# Altium PCB PBC2A.PcbDoc
Units mm, origin at the board's own origin, x right, y up, seen from the top; angles counter-clockwise.
Board outline 55 x 70 mm, 2 copper layers (Top Layer, Bottom Layer); 74 components, 53 nets, 225 pads, 17 vias.
Unrouted connection lines stored in the file: 43.
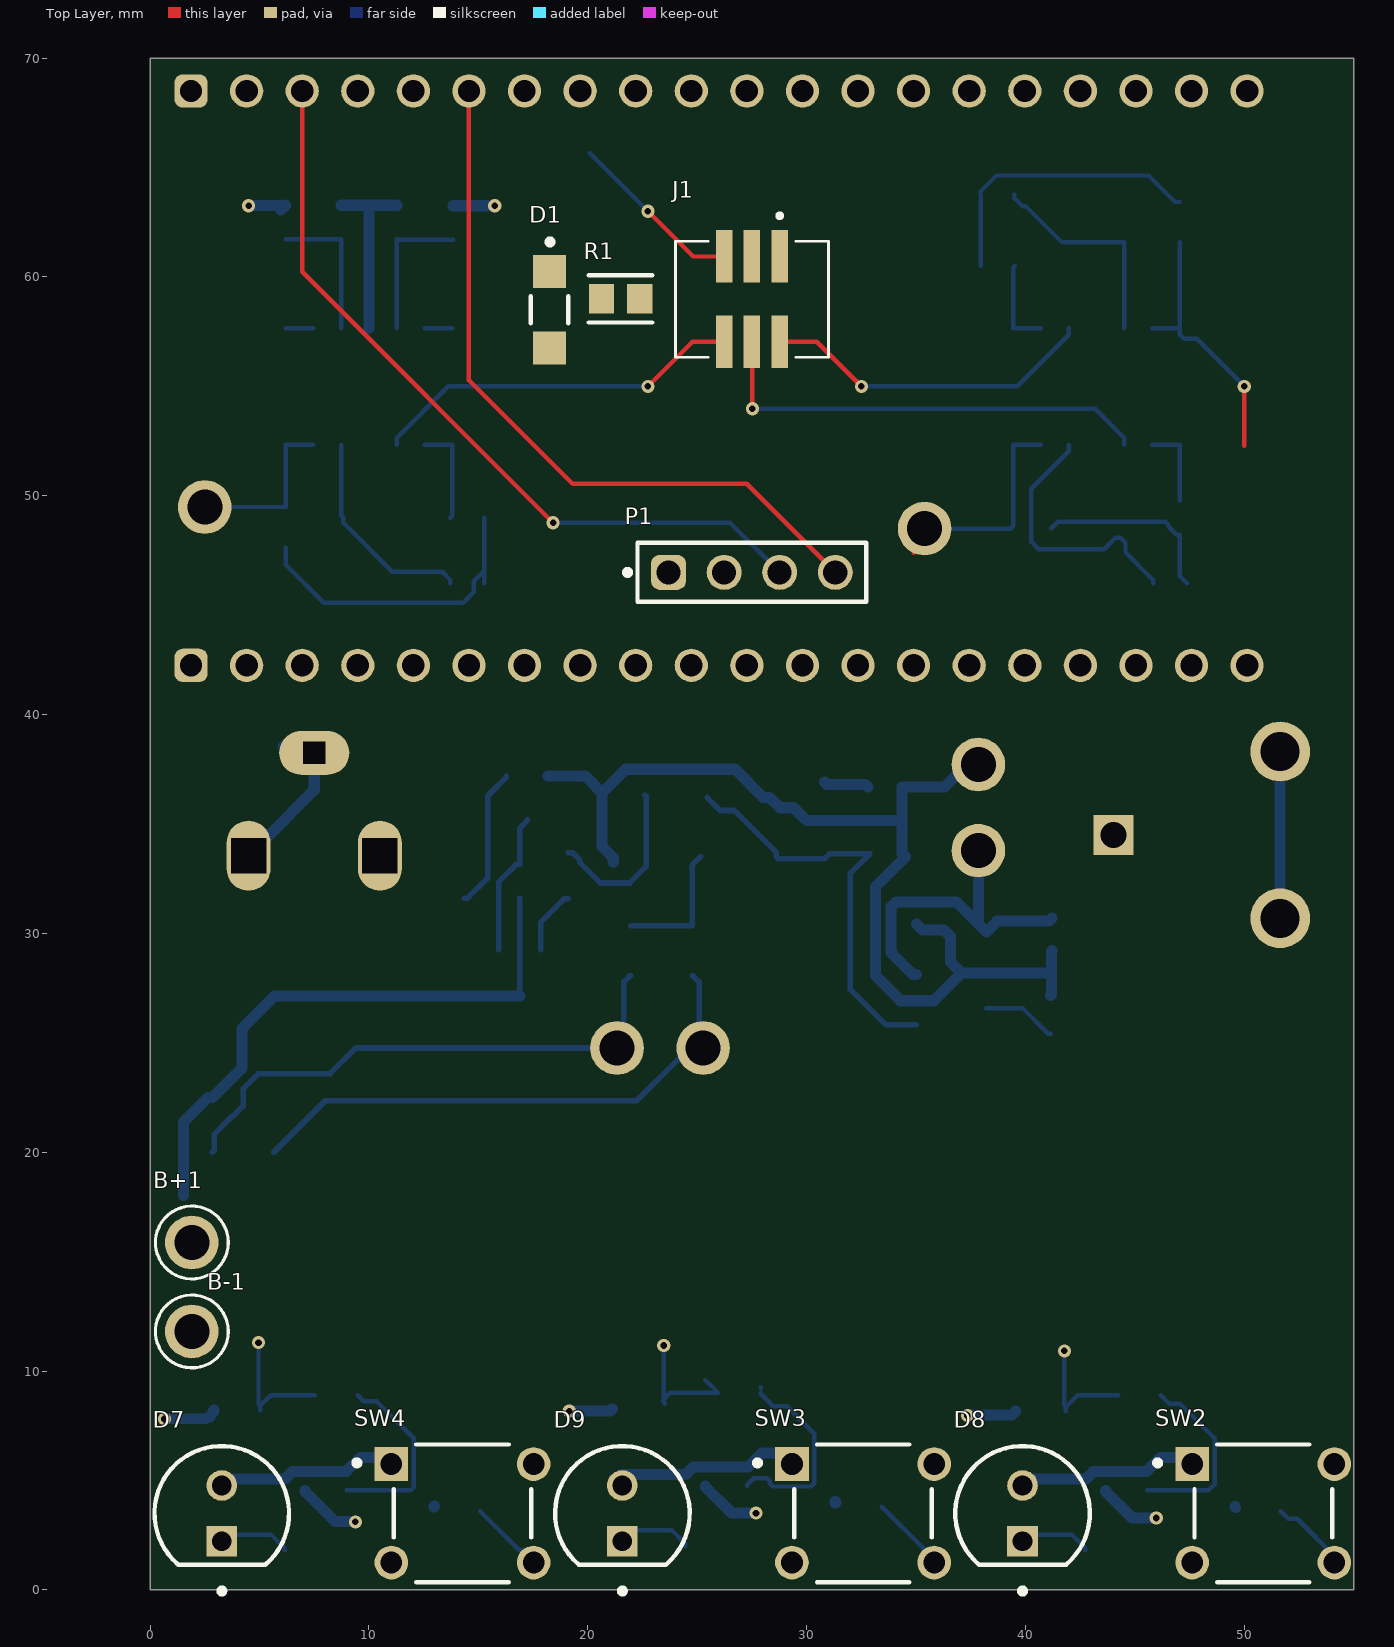
[diagram p0: Top Layer view]
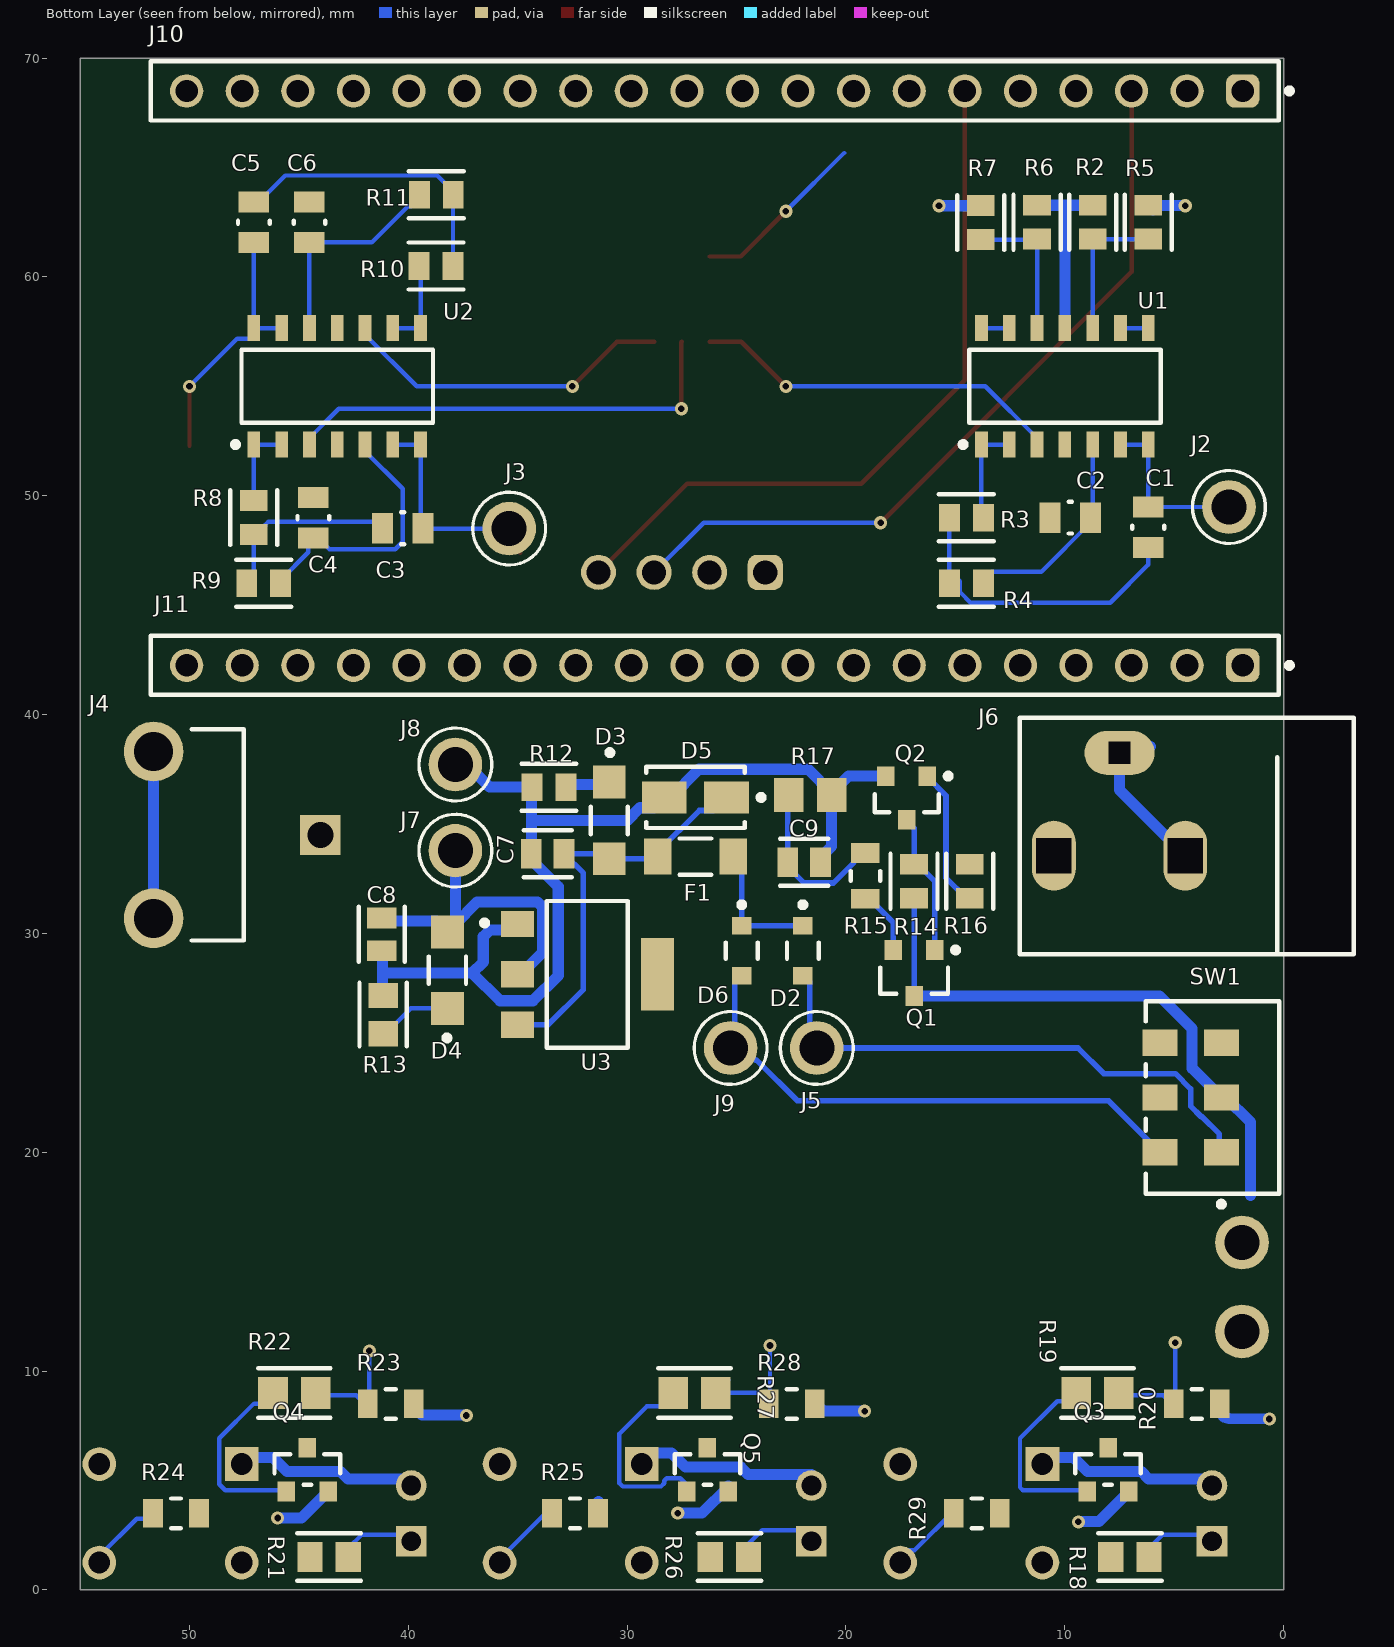
[diagram p1: Bottom Layer view, seen from below]
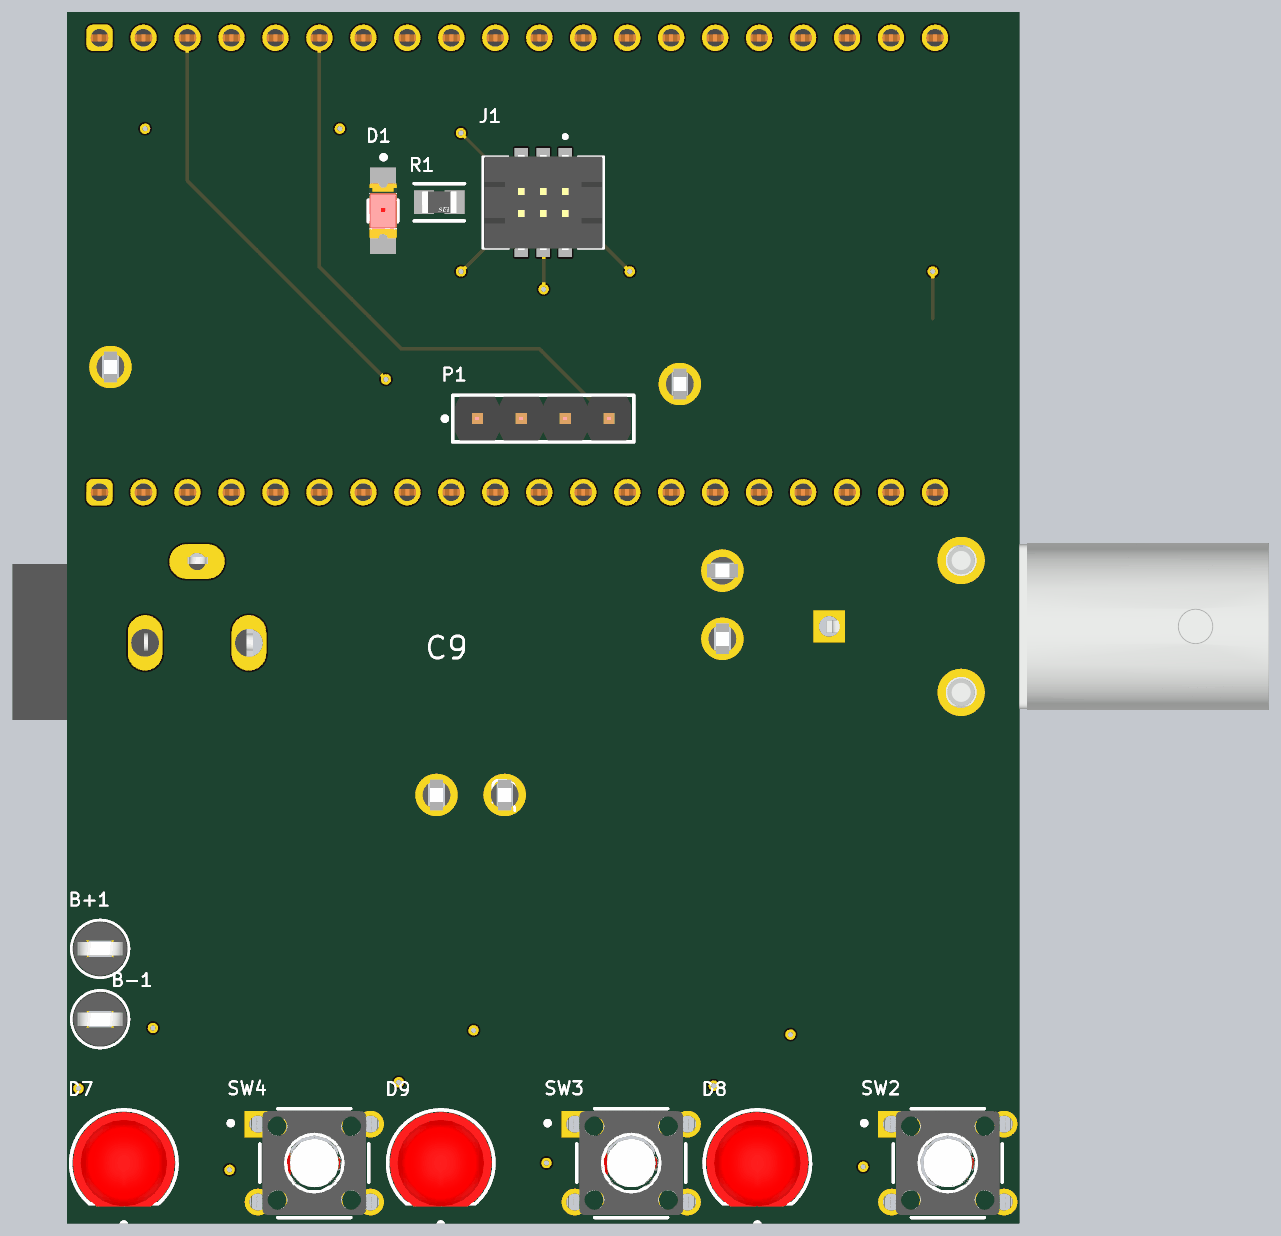
[diagram p2: 3D render of the assembled board from above, using the file's embedded part models]
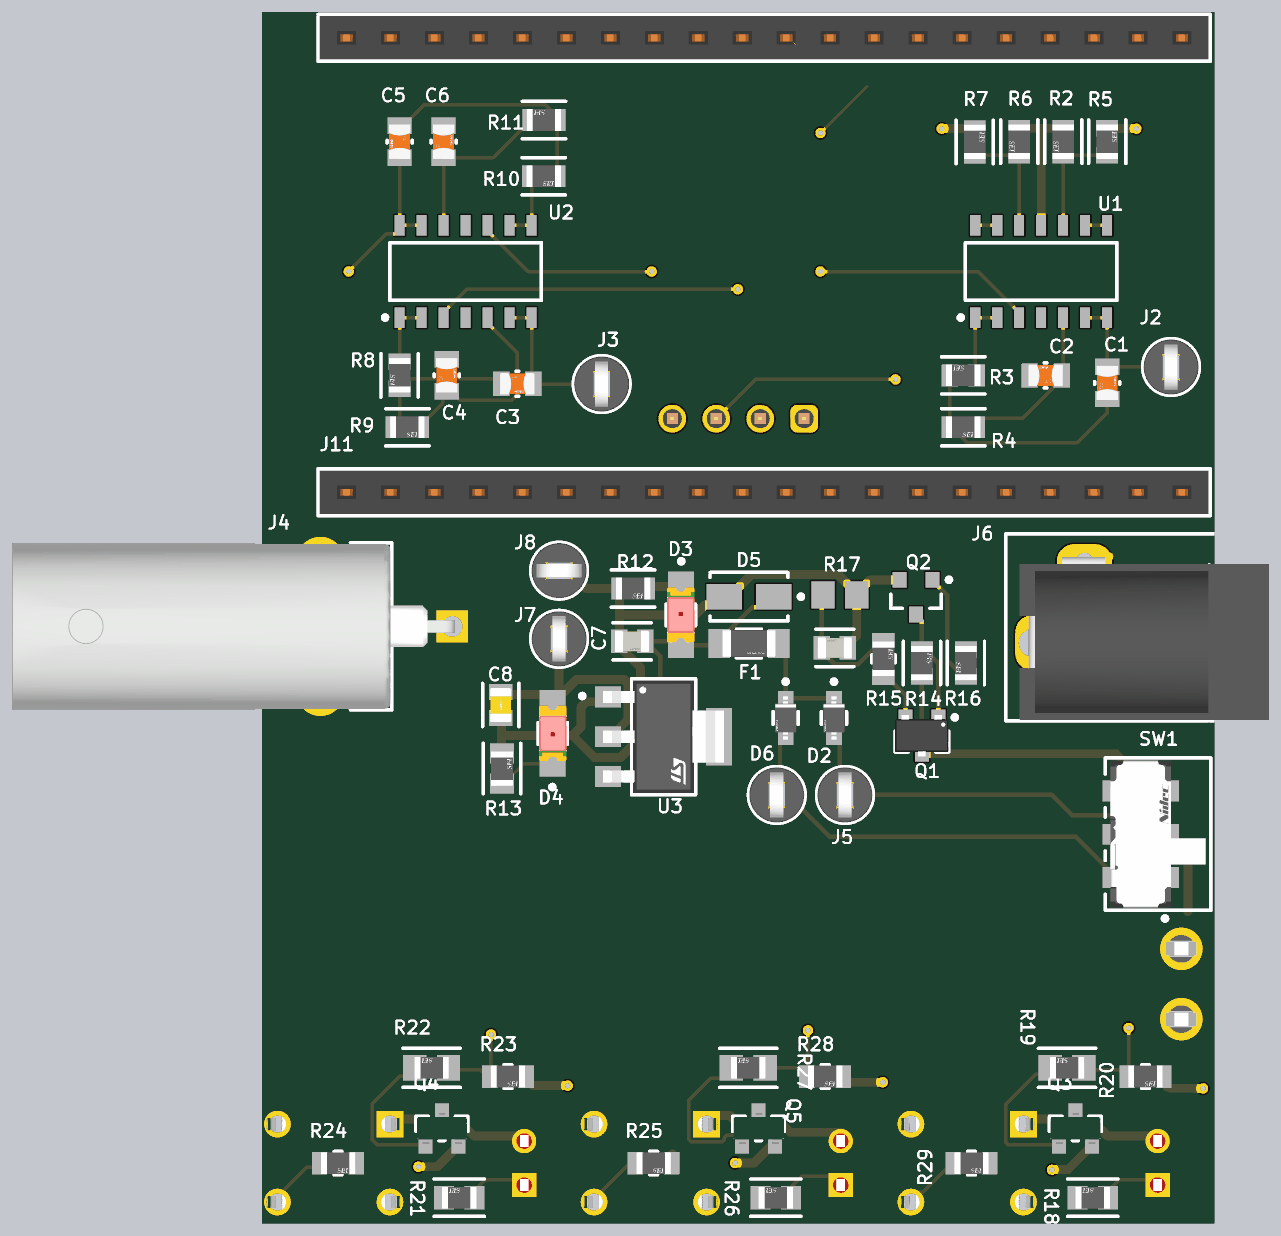
[diagram p3: 3D render of the assembled board from below, using the file's embedded part models]

## Layer stack, top to bottom
Top Solder: solder mask 0.0102, Solder Resist, Dk 3.5
Top Layer: signal copper 0.0356
Dielectric 1: dielectric 0.32, FR-4, Dk 4.8
Bottom Layer: signal copper 0.0356
Bottom Solder: solder mask 0.0102, Solder Resist, Dk 3.5

## Board outline
0,0 55,0 55,70 0,70

## Design rules (kind name [scope] priority, off if disabled: settings)
Clearance "Polygon Clearance" [InPolygon] p1: gap=0.254 ignorepadtopadclearanceinfootprint=TRUE
Clearance [All] p2: gap=0.152 ignorepadtopadclearanceinfootprint=FALSE
HoleSize [All] p1: absolutevalues=TRUE maxlimit=25.4 minlimit=0.2 maxpercent=80.000 minpercent=20.000
MinimumSolderMaskSliver [All] p1: minsoldermaskwidth=0.102
PolygonConnect [All] p1: connectstyle=Relief reliefconductorwidth=0.254 reliefentries=4 polygonreliefangle="90 Angle" airgapwidth=0.254
RoutingCorners [All] p1: cornerstyle=45-Degree minsetback=0.254 maxsetback=0.254
RoutingVias [All] p1: holewidth=0.3 width=0.6 viastyle="Through Hole" minholewidth=0.3 minwidth=0.6 maxholewidth=0.3 maxwidth=0.6
SilkToSolderMaskClearance SilkscreenOverComponentPads [All] p1: minsilkscreentomaskgap=0.1 clearancetoexposedcopper=TRUE
SolderMaskExpansion [All] p1: expansion=0.102 istentingtop=FALSE
SupplyNets "Schematic Supply Nets" [InNet('+3V3')] p1: voltage=0.000
Width "Width GND" [InNet('GND')] p1: maxlimit=0.508 minlimit=0.508 preferedwidth=0.508
Width "Width Power" [InNet('+3V3') OR InNetClass('PWR')] p2: maxlimit=0.508 minlimit=0.508 preferedwidth=0.508
Width [All] p3: maxlimit=0.508 minlimit=0.152 preferedwidth=0.203
26 further rules are at their usual default settings.

## Components (designator, comment, footprint, x,y, rotation, side; value= is the part's Value field where it differs from the comment)
B+1 "5006" FP-5006-MFG 1.905,15.875 r0 top
B-1 "5006" FP-5006-MFG 1.905,11.811 r0 top
C1 "33nF" FP-CC0805-0_85-MFG 6.19,48.561 r90 bottom value="33 nF"
C2 "33nF" FP-CC0805-0_85-MFG 9.75,49 r0 bottom value="33 nF"
C3 "33nF" FP-CC0805-0_85-MFG 40.259,48.514 r180 bottom value="33 nF"
C4 "33nF" FP-CC0805-0_85-MFG 44.342,49 r90 bottom value="33 nF"
C5 "33nF" FP-CC0805-0_85-MFG 47.06,62.5 r270 bottom value="33 nF"
C6 "33nF" FP-CC0805-0_85-MFG 44.52,62.5 r90 bottom value="33 nF"
C7 "0.1uF" FP-C0805C-DN-MFG 33.634,33.637 r0 bottom value="0.10 μF"
C8 "10uF" FP-C0805C106J8RACAUTO-MFG 41.217,29.96 r270 bottom
C9 "C0805C103J5RAC7210" FP-C0805C-DN-MFG 21.916,33.257 r180 bottom value="10,000 pF"
D1 "LTST-C150KRKT" FP-LTST-C150KRKT-MFG 18.25,58.5 r270 top
D2 "CUS08F30,H3F" FP-USC-MFG 21.971,29.21 r270 bottom
D3 "LTST-C150KRKT" FP-LTST-C150KRKT-MFG 30.818,35.162 r270 bottom
D4 "LTST-C150KRKT" FP-LTST-C150KRKT-MFG 38.217,28.321 r90 bottom
D5 "TVS" VISH-DO-214AC-2_L 26.881,36.215 r0 bottom
D6 "CUS08F30,H3F" FP-USC-MFG 24.765,29.21 r270 bottom
D7 "WP7113SURC" FP-WP7113SURC-MFG 3.275,3.5 r90 top
D8 "WP7113SURC" FP-WP7113SURC-MFG 39.868,3.5 r90 top
D9 "WP7113SURC" FP-WP7113SURC-MFG 21.58,3.5 r90 top
F1 "SF-1206S050-2" FP-SF-1206S-MFG 26.881,33.511 r0 bottom value=596mΩ
J1 "20021221-00006C4LF" AMPHENOL_20021221-00006C4LF 27.5,58.984 r0 top
J2 "5006" FP-5006-MFG 2.5,49.486 r90 bottom
J3 "5006" FP-5006-MFG 35.39,48.5 r90 bottom
J4 "5414373-1" FP-5414373-1-MFG 58.5,34.5 r270 bottom locked
J5 "5006" FP-5006-MFG 21.336,24.765 r270 bottom
J6 "PJ-102AH" "CON Barrel PJ-102AH" 7.5,38.25 r0 bottom locked
J7 "5006" FP-5006-MFG 37.849,33.782 r90 bottom
J8 "5006" FP-5006-MFG 37.849,37.719 r0 bottom
J9 "5006" FP-5006-MFG 25.273,24.765 r270 bottom
J10 "61302011821" 61302011821 26,68.5 r0 bottom locked
J11 "61302011821" 61302011821 26,42.25 r0 bottom
P1 "61300411121" 61300411121 27.5,46.5 r0 top locked
Q1 "SSM3J328R,LF" TOSH-SOT-23F_V 16.891,28.194 r270 bottom
Q2 "MMBT3904LT1G" ONSC-SOT-23-3-318-08_V 17.229,36.189 r270 bottom
Q3 "DMN2004K-7" FP-SOT23-MFG 8.025,5.5 r90 bottom
Q4 "DMN2004K-7" FP-SOT23-MFG 44.618,5.5 r90 bottom
Q5 "DMN2004K-7" FP-SOT23-MFG 26.33,5.5 r90 bottom
R1 "300Ω" FP-RMCF0805-IPC_B 21.5,59 r0 top
R2 "100k" FP-RMCF0805-IPC_C 8.73,62.5 r270 bottom
R3 "100k" FP-RMCF0805-IPC_C 14.5,49 r0 bottom
R4 "100k" FP-RMCF0805-IPC_C 14.5,46 r180 bottom
R5 "100k" FP-RMCF0805-IPC_C 6.19,62.5 r90 bottom
R6 "100k" FP-RMCF0805-IPC_C 11.27,62.5 r270 bottom
R7 "100k" FP-RMCF0805-IPC_C 13.843,62.484 r90 bottom
R8 "100k" FP-RMCF0805-IPC_C 47.06,49 r270 bottom
R9 "100k" FP-RMCF0805-IPC_C 46.609,46 r180 bottom
R10 "100k" FP-RMCF0805-IPC_C 38.735,60.5 r180 bottom
R11 "100k" FP-RMCF0805-IPC_C 38.721,63.75 r0 bottom
R12 "RMCF0805JT3K00" FP-RMCF0805-IPC_C 33.575,36.686 r180 bottom
R13 "RMCF0805JT300R" FP-RMCF0805-IPC_B 41.148,26.289 r90 bottom
R14 "RMCF0805FG100K" FP-RMCF0805-IPC_C 16.891,32.385 r90 bottom
R15 "RMCF0805FT10K0" FP-RMCF0805-MFG 19.113,32.629 r90 bottom
R16 "RMCF0805FT1K00" FP-RMCF0805-IPC_C 14.351,32.385 r270 bottom
R17 "ERJ-6GEYJ563V" RESC2013X70X40ML20T20 21.631,36.322 r0 bottom
R18 "300Ω" FP-RMCF0805-IPC_B 7.025,1.5 r0 bottom
R19 "100Ω" FP-RMCF0805-IPC_A 8.509,9 r0 bottom
R20 "10k" FP-RMCF0805-MFG 3.976,8.5 r180 bottom
R21 "300Ω" FP-RMCF0805-IPC_B 43.618,1.5 r0 bottom
R22 "100Ω" FP-RMCF0805-IPC_A 45.212,9 r0 bottom
R23 "10k" FP-RMCF0805-MFG 40.801,8.5 r180 bottom
R24 "10k" FP-RMCF0805-MFG 50.618,3.5 r180 bottom
R25 "10k" FP-RMCF0805-MFG 32.385,3.5 r180 bottom
R26 "300Ω" FP-RMCF0805-IPC_B 25.33,1.5 r0 bottom
R27 "100Ω" FP-RMCF0805-IPC_A 26.924,9 r0 bottom
R28 "10k" FP-RMCF0805-MFG 22.479,8.5 r180 bottom
R29 "10k" FP-RMCF0805-MFG 14.025,3.5 r180 bottom
SW1 "CL-SB-22A-11T" FP-CL-SB-22A-11T-MFG 3.25,22.5 r90 bottom
SW2 "2-1825910-7" FP-2-1825910-7-MFG 50.868,3.5 r90 top
SW3 "2-1825910-7" FP-2-1825910-7-MFG 32.58,3.5 r90 top
SW4 "2-1825910-7" FP-2-1825910-7-MFG 14.275,3.5 r90 top
U1 "LM324DR2G" ONSC-SOIC-14-751A-03_V 10,55 r90 bottom
U2 "LM324DR2G" ONSC-SOIC-14-751A-03_V 43.25,55 r90 bottom
U3 "LD1117S33CTR" FP-SOT-223-0046067_14-MFG 31.816,28.129 r180 bottom

## Footprints (in the part's own frame and the unit in brackets; to place one, negate y for a bottom-side part, rotate by r counter-clockwise, add the part's x,y. Pads: shape width x height; smd on the part's side, far side on the other; paste and mask are expansions set on the pad)
61300411121 [mm] "Pin Header, pitch 2.54 mm, THT, Vertical, single row, 4p"
  rrect50% 1.6x1.6 hole 1.1: 1(-3.81,0)
  round 1.6 hole 1.1: 2(-1.27,0) 3(1.27,0) 4(3.81,0)
  silkscreen extent -5.8,-1.35 5.23,1.34, body extent -5.08,-1.27 5.08,1.27, height 8.57
61302011821 [mm] "Socket Header, Pitch 2.54 mm, THT, Vertical, single row, 20p"
  rrect50% 1.52x1.52 hole 1.02: 1(-24.13,0)
  round 1.52 hole 1.02: 2(-21.59,0) 3(-19.05,0) 4(-16.51,0) 5(-13.97,0) 6(-11.43,0) 7(-8.89,0) 8(-6.35,0) 9(-3.81,0) 10(-1.27,0) 11(1.27,0) 12(3.81,0) 13(6.35,0) 14(8.89,0) 15(11.43,0) 16(13.97,0) 17(16.51,0) 18(19.05,0) 19(21.59,0) 20(24.13,0)
  silkscreen extent -26.38,-1.35 25.78,1.35, body extent -25.65,-1.25 25.65,1.25, height 8.55
AMPHENOL_20021221-00006C4LF [mm]
  rect 0.76x2.4 smd: 1(1.27,1.95) 2(1.27,-1.95) 3(0,1.95) 4(0,-1.95) 5(-1.27,1.95) 6(-1.27,-1.95)
  silkscreen extent -3.5,-2.65 3.5,3.91, body extent -3.4,-2.75 3.4,2.75, height 5.6
"CON Barrel PJ-102AH" [mm] "5.5mm Barrel Plug (2.1mm ID)"
  oval 2x3.2 hole 1.6 square: 1(3,4.7) 2(-3,4.7)
  oval 3.2x2 hole 1 square: 3(0,0)
  silkscreen extent -10.7,-1.6 4.55,9.2, body extent -10.65,-0.25 3.75,9.15, height 11.01
FP-2-1825910-7-MFG [mm]
  rect 1.54x1.54 hole 0.99 paste-2539.97 mask+0: 1(2.25,3.25)
  round 1.54 hole 0.99 paste-2539.97 mask+0: 2(2.25,-3.25) 3(-2.25,3.25) 4(-2.25,-3.25)
  silkscreen extent -3.14,-3.14 3.15,4.95, body extent -3.24,-4.12 3.24,4.12, height 0.25
FP-5006-MFG [mm]
  round 2.45 hole 1.6 paste-2539.97 mask+0: 1(0,0)
  silkscreen extent -1.66,-1.66 1.67,1.66, body extent -1.77,-1.77 1.77,1.77, height 0.25
FP-5414373-1-MFG [mm]
  rect 1.84x1.84 hole 1.19 paste-2539.97 mask+0: 1(0,14.48)
  round 2.73 hole 1.78 paste-2539.97 mask+0: 2(-3.81,6.86) 3(3.81,6.86)
  silkscreen extent -4.83,8.6 4.83,10.98, body extent -4.83,-10.92 4.83,14.63, height 9.34
FP-C0805C106J8RACAUTO-MFG [mm]
  rect 0.95x1.35 smd paste+0 mask+0: 1(-0.75,0) 2(0.75,0)
  silkscreen extent -1.25,-1.05 1.25,1.05, body extent -1,-0.63 1,0.63, height 1.45
FP-C0805C-DN-MFG [mm]
  rect 0.95x1.35 smd paste+0 mask+0: 1(-0.75,0) 2(0.75,0)
  silkscreen extent -1.1,-1.07 1.1,1.07, body extent -1,-0.63 1,0.63, height 0.88
FP-CC0805-0_85-MFG [mm]
  rect 0.95x1.4 smd paste+0 mask+0: 1(-0.925,0) 2(0.925,0)
  silkscreen extent -0.07,-0.73 0.08,0.72, body extent -1,-0.63 1,0.63, height 0.95
FP-CL-SB-22A-11T-MFG [mm]
  rect 1.2x1.6 smd paste+0 mask+0: 1(-2.5,-0.4) 2(0,-0.4) 3(2.5,-0.4) 4(-2.5,2.4) 5(0,2.4) 6(2.5,2.4)
  silkscreen extent -5,-3.05 4.4,3.05, body extent -4.25,-2.75 4.25,2.75, height 3.8
FP-LTST-C150KRKT-MFG [mm]
  rect 1.5x1.5 smd paste+0 mask+0: 1(-1.75,0) 2(1.75,0)
  silkscreen extent -3.22,-0.85 0.62,0.85, body extent -2.6,-0.95 2.6,0.95, height 0.25
FP-RMCF0805-IPC_A [mm]
  rect 1.355x1.462 smd paste+0 mask+0: 1(-0.976,0) 2(0.976,0)
  silkscreen extent -1.65,-1.13 1.65,1.13, body extent -1,-0.63 1,0.63, height 0.65
FP-RMCF0805-IPC_B [mm]
  rect 1.155x1.362 smd paste+0 mask+0: 1(-0.876,0) 2(0.876,0)
  silkscreen extent -1.45,-1.08 1.45,1.08, body extent -1.7,-0.93 1.7,0.93, height 0.25
FP-RMCF0805-IPC_C [mm]
  rect 0.955x1.262 smd paste+0 mask+0: 1(-0.776,0) 2(0.776,0)
  silkscreen extent -1.25,-1.07 1.25,1.08, body extent -1,-0.63 1,0.63, height 0.65
FP-RMCF0805-MFG [mm]
  rect 0.9x1.3 smd paste+0 mask+0: 1(-1.05,0) 2(1.05,0)
  silkscreen extent -0.23,-0.67 0.22,0.67, body extent -1,-0.63 1,0.63, height 0.65
FP-SF-1206S-MFG [mm]
  rect 1.25x1.65 smd paste+0 mask+0: 1(-1.725,0) 2(1.725,0)
  silkscreen extent -0.73,-0.82 0.73,0.82, body extent -1.55,-0.77 1.55,0.77, height 0.7
FP-SOT23-MFG [mm]
  rect 0.9x0.8 smd paste+0 mask+0: 1(-1,0.95) 2(-1,-0.95) 3(1,0)
  silkscreen extent -0.7,-1.5 0.7,1.5, body extent -1.2,-1.46 1.2,1.44, height 1.1
FP-SOT-223-0046067_14-MFG [mm]
  rect 1.5x1.2 smd paste+0 mask+0: 1(-3.2,2.3) 2(-3.2,0) 3(-3.2,-2.3)
  rect 1.5x3.3 smd paste+0 mask+0: 4(3.2,0)
  silkscreen extent -4.83,-3.35 1.85,3.35, body extent -3.5,-3.25 3.5,3.25, height 1.9
FP-USC-MFG [mm]
  rect 0.8x0.9 smd paste+0 mask+0: 1(-1.15,0) 2(1.15,0)
  silkscreen extent -2.22,-0.73 0.38,0.72, body extent -1.25,-0.63 1.25,0.63, height 1.15
FP-WP7113SURC-MFG [mm]
  rect 1.4x1.4 hole 0.9 paste-2539.97 mask+0: 1(-1.27,0)
  round 1.4 hole 0.9 paste-2539.97 mask+0: 2(1.27,0)
  silkscreen extent -3.67,-3.07 3.07,3.07, body extent -2.5,-2.95 2.94,2.95, height 9.85
ONSC-SOIC-14-751A-03_V [mm] "SOIC, 14-Leads, Body 8.75x4mm, Pitch 1.27mm"
  rect 1.18x0.58 smd: 1(-2.66,3.81) 2(-2.66,2.54) 3(-2.66,1.27) 4(-2.66,0) 5(-2.66,-1.27) 6(-2.66,-2.54) 7(-2.66,-3.81) 8(2.66,-3.81) 9(2.66,-2.54) 10(2.66,-1.27) 11(2.66,0) 12(2.66,1.27) 13(2.66,2.54) 14(2.66,3.81)
  silkscreen extent -2.78,-4.38 1.67,4.78, body extent -2,-4.38 2,4.38, height 1.75
ONSC-SOT-23-3-318-08_V [mm] "SOT23, 3-Leads, Body 2.92x1.3mm, Pitch 0.95mm"
  rect 0.9x0.8 smd: 1(-1,0.95) 2(-1,-0.95) 3(1,0)
  silkscreen extent -1.12,-1.46 0.65,2.02, body extent -0.65,-1.46 0.65,1.46, height 1.11
RESC2013X70X40ML20T20 [mm] "Chip Resistor, 2-Leads, Body 2.00x1.25mm, IPC Low Density"
  rect 1.35x1.55 smd: 1(-0.975,0) 2(0.975,0)
  body extent -1.1,-0.72 1.1,0.72, height 0.7
TOSH-SOT-23F_V [mm] "SOTFL, 3-Leads, Body 3.1x1.9mm, Pitch 0.95mm"
  rect 0.9x0.8 smd: 1(-1.05,0.95) 2(-1.05,-0.95) 3(1.05,0)
  silkscreen extent -1.17,-1.55 0.95,2.02, body extent -1.2,-1.55 1.2,1.55, height 0.88
VISH-DO-214AC-2_L [mm] "DO-214AC, 2-Leads, Body 4.5x2.79mm, IPC High Density"
  rect 2.05x1.45 smd: 1(-1.425,0) 2(1.425,0)
  silkscreen extent -3.12,-1.4 2.25,1.4, body extent -2.25,-1.4 2.25,1.4, height 2.29

## Part data
B+1 B-1 J2 J3 J5 J7 J8 J9: library part CMP-19636-000022-1, "PC TEST POINT COMPACT BLACK", Color=Black, Flammability Rating="UL94 V-0", Package Quantity=100, Body Material=Bronze, Contact Material=Bronze, Contact Plating=Tin, Height=0.35inch, Hole Diameter=1.6mm, Housing Color=Black, Inside Diameter=1.78mm, Insulation Material=Nylon, Lead Free="Lead Free", Length=8.89mm, Material=Nylon, Mount=PCB, Number of Ports=1, Orientation=Straight, Outside Diameter=3.18mm, Packaging=Bulk, Plating=Silver, REACH SVHC="No SVHC", RoHS Compliant=Yes, Series=THM
C1 C2 C3 C4 C5 C6: library part CMP-03422-000099-1, "CAP CER 0.033UF 50V X7R 0805, CC0805KRX7R9BB333", Capacitance="33 nF", Manufacturer=Yageo, Manufacturer Part Number=CC0805KRX7R9BB333, Package=CC0805-0.85, Temperature="-30°C to +85°C", Temperature Characteristic=X7R, Temperature Range High=+85°C, Temperature Range Low=-30°C, Tolerance=0.1, Voltage Rating="50 V", Automotive=No, Category=Cap, ComponentLink2Description=Datasheet, ComponentLink2URL=http://www.yageo.com/documents/recent/UPY-GPHC_Y5V_6.3V-to-50V_8.pdf, Device Class L1="Passive Components", Device Class L2=Capacitors, Device Class L3="Ceramic Capacitors", Digikey Description="CAP CER 0.033UF 50V X7R 0805", Footprint Url=http://www.yageo.com/exep/pages/download/literatures/UPY-C_GEN_24.pdf, Height=0.95mm, Ipc Land Pattern Name=CAPC200125X85, Lead Free=Yes, Material=Ceramic, Mouser Description="Multilayer Ceramic Capacitors MLCC - SMD/SMT 33nF 50V X7R 10%", Octopart=https://octopart.com/cc0805krx7r9bb333-yageo-42333931, RoHS=TRUE
C7: library part CMP-03020-000950-1, "CAP CER 0.1UF 50V X7R 0805", Capacitance="0.10 μF", Manufacturer=KEMET, Manufacturer Part Number=C0805C104J5RACTU, Package=C0805C-DN, Temperature="-55°C to +125°C", Temperature Characteristic=X7R, Temperature Coefficient=30ppm/°C, Temperature Range High=+125°C, Temperature Range Low=-55°C, Tolerance=0.05, Voltage Rating="50 V", Automotive=No, Category=Cap, ComponentLink2Description=Datasheet, ComponentLink2URL=https://content.kemet.com/datasheets/KEM_C1003_C0G_SMD.pdf, Device Class L1="Passive Components", Device Class L2=Capacitors, Device Class L3="Ceramic Capacitors", Digikey Description="CAP CER 0.1UF 50V X7R 0805", Height=0.88mm, Ipc Land Pattern Name=CAPC200125X78, Lead Free=Yes, Material=Ceramic, Mouser Description="Multilayer Ceramic Capacitors MLCC - SMD/SMT 50volts 0.1uF X7R 5%", Octopart=https://octopart.com/c0805c104j5ractu-kemet-104634, RoHS=TRUE
C8: library part CMP-03020-034708-1, "CAP CER 10UF 10V X7R 0805", Case Code (Imperial)=0805, Case Code (Metric)=2012, Max Operating Temperature=125°C, Min Operating Temperature=-55°C, Ratings=AEC-Q200, Tolerance=5%, Voltage Rating=10V, Capacitance=10uF, Case/Package=0805, Mount="Surface Mount", Packaging="Tape and Reel", RoHS Compliant=Yes
C9: library part CMP-2007-01173-3, "CAP CER SMD 0805 .01UF X7R 5% 50", Capacitance="10,000 pF", Manufacturer=KEMET, Package=C0805C-DN, Temperature="-55°C to +125°C", Temperature Characteristic=X7R, Temperature Coefficient=30ppm/°C, Temperature Range High=+125°C, Temperature Range Low=-55°C, Tolerance=0.05, Voltage Rating="50 V", Automotive=No, Category=Cap, ComponentLink2Description=Datasheet, ComponentLink2URL=https://content.kemet.com/datasheets/KEM_C1003_C0G_SMD.pdf, Device Class L1="Passive Components", Device Class L2=Capacitors, Device Class L3="Ceramic Capacitors", Digikey Description="CAP CER SMD 0805 .01UF X7R 5% 50", Height=0.88mm, Ipc Land Pattern Name=CAPC200125X78, Lead Free=Yes, Manufacturer Part Number=C0805C103J5RAC7210, Material=Ceramic, Mouser Description="Cap Ceramic 0.01uF 50V X7R 5% Pad SMD 0805 125C T/R", Octopart=https://octopart.com/c0805c103j5rac7210-kemet-3921106, RoHS=TRUE
D1 D3 D4: library part CMP-2000-06617-2, "LED RED CLEAR 1206 SMD", Case Code (Imperial)=1206, Case Code (Metric)=3216, Color=Red, Forward Current=30mA, Forward Voltage=2V, Lens Color=Colorless, Max Operating Temperature=85°C, Min Operating Temperature=-30°C, Package Quantity=1, Power Dissipation=62.5mW, Power Rating=75mW, Reverse Voltage=5V, Test Current=20mA, Case/Package=1206, Depth=1.6mm, Dominant Wavelength=631nm, Height=1.1mm, Illumination Color=Red, Lead Free="Lead Free", Length=3.2mm, Lens Style=Diffused, Lens Transparency=Clear, Luminous Intensity=54mcd, Mount="Surface Mount", Number of Elements=1, Number of LEDs=1, Number of Pins=2, Packaging="Tape and Reel", Radiation Hardening=No, Viewing Angle=130°, Wavelength=639nm, Width=1.6mm
D2 D6: library part CMP-00375-53632863-1, "CUS08F30,H3F Rectifier Diode, Schottky, 1 Phase, 1 Element, 0.8A, 30V V(RRM), Silicon", Average Rectified Current=800mA, Capacitance=170pF, Case/Package=SOD, Max Forward Surge Current (Ifsm)=5A, Max Junction Temperature (Tj)=125°C, Max Repetitive Reverse Voltage (Vrrm)=30V, Min Operating Temperature=-55°C, Peak Reverse Current=50µA, Contact Plating="Silver, Tin", Element Configuration=Single, Forward Current=800mA, Height=1.15mm, Max Operating Temperature=125°C, Max Reverse Voltage (DC)=30V, Mount="Surface Mount", NexarPartId=53632863, Number of Pins=2, Packaging=Digi-Reel®, Peak Non-Repetitive Surge Current=5A, Reverse Voltage=30V, RoHS=Compliant, Schedule B="8541100080, 8541100080"
D5: library part CMP-0548-00238-2, "Transient Voltage Suppressor, 6.40 to 231 V, 10 V Stand-off Voltage, Uni-Directional, -55 to 155 degC, 2-pin DO-214AC, Pb-Free, Tape and Reel", Manufacturer="Vishay Semiconductor", Operating Junction and Storage Temperature Range="-55 to 150 degC", PartNumber=SMAJ10A-E3/61, ComponentLink1Description="Manufacturer URL", ComponentLink1URL=http://www.vishay.com/, ComponentLink2Description=Datasheet, ComponentLink2URL=http://www.vishay.com/docs/88390/smaj50a.pdf, ComponentLink3Description="Package Specification", ComponentLink3URL=http://www.vishay.com/docs/88390/smaj50a.pdf, DatasheetVersion=12/8/2013, ID (uA)=1, IFSM="40 A", Mounting Technology="Surface Mount", PackageDescription="2-Pin DO-214AC (SMA), Body 4.245 x 2.665 mm", PackageReference=DO-214AC-2, Packing="Tape and Reel", PPPM (W)="400, 300", RoHS=TRUE, VBR Uni-Directional (V)="6.4 to 231", VWM (V)=10
D7 D8 D9: library part CMP-00682-00869413-1, "WP7113SURC Red 5 mm 20 º Water Clear 3800 mcd 1.9 V Solid State LED Lamp - T-1 3/4", Case/Package=Radial, Color=Red, Forward Current=20mA, Forward Voltage=1.9V, Max Junction Temperature (Tj)=115°C, Max Operating Temperature=85°C, Min Operating Temperature=-40°C, Power Dissipation=75mW, Reverse Voltage=5V, Dominant Wavelength=630nm, Height=8.6mm, Illumination Color=Red, Lead Free="Lead Free", Lens Style="Clear, Dome", Luminous Intensity=1.4cd, Mount="Through Hole", NexarPartId=869413, Packaging=Bulk, RoHS=Compliant, Test Current=20mA, Viewing Angle=20°, Wavelength=628nm
F1: library part CMP-07399-000002-1, "FUSE BOARD MNT 500MA 63VDC 1206", Fuse Current=0.5A, Fuse Interrupt Dc Current=50A, Manufacturer=Bourns, Max Fuse Dc Voltage=63V, Package=SF-1206S, Resistance=596mΩ, Temperature="-20°C to +105°C", Temperature Range High=+105°C, Temperature Range Low=-20°C, Automotive=No, Category=Fuse, ComponentLink2Description=Datasheet, ComponentLink2URL=https://www.bourns.com/docs/product-datasheets/sf-1206s.pdf?sfvrsn=e6b376e3_33, Device Class L1="Circuit Protection", Device Class L2=Fuses, Device Class L3=unset, Digikey Description="FUSE BOARD MNT 500MA 63VDC 1206", Fuse Blow Speed=Slow, Fuse I2T=0.03A2Sec, Height=0.7mm, Ipc Land Pattern Name=CAPC310155X60, Lead Free=Yes, Manufacturer Part Number=SF-1206S050-2, Mouser Description="Fuse Chip Slow Blow Acting 0.5A 63V SMD Solder Pad 1206 T/R UL", Octopart=https://octopart.com/sf-1206s050-2-bourns-8398336, RoHS=TRUE, Voltage Rating=63V
J1: Package=None, Availability=Unavailable, MF="Amphenol ICC", MP=20021221-00006C4LF, Price=None
J4: library part CMP-03357-000008-1, "CONN BNC JACK R/A 50 OHM PCB", Dielectric Material=Polymethylpentene, Frequency=4GHz, Housing Color=Silver, Insulation Resistance=5GR, Max Operating Temperature=85°C, Min Operating Temperature=-55°C, Operating Frequency="0 to 4 GHz", Package Quantity=50, Voltage Rating=500V, Body Material=Zinc, Body Plating=Nickel, Center Contact Plating=Gold, Connector Type=BNC, Contact Material=Bronze, Contact Plating=Gold, Fastening Type=Bayonet, Gender=Female, Impedance=50R, Insulation Material=Polymethylpentene, Length=25.4mm, Mating Cycles=500, Max Frequency=4GHz, Mount="Through Hole", Number of Ports=1, Number of Positions=1, Orientation="Right Angle", Packaging=Tray, PCB Mount Retention=Without, PCB Mounting Orientation="Right Angle", Polarity=Standard, Radiation Hardening=No, Sealable="No (Without)", Series=-, Termination="Through Hole", Wire/Cable Type=Coaxial
J6: library part "CON PWR PJ-102AH", "Power Barrel Con, 2.0mm ID, 5.5mm OD, 5A", Manufacturer="CUI Devices", Digikey Order=CP-102AH-ND, Manufacturer Code=PJ-102AH, Supplier 1="Arrow Electronics", Supplier Part Number 1=PJ-102AH
J10 J11: library part CMP-1502-01348-3, Contact Resistance=20mΩ, Current Rating=3A, Operating Supply Voltage=250V, Gender=Female, Lead Pitch=2.54mm, NexarPartId=61924744, Number of Pins=20, Orientation=Vertical, RoHS=Non-Compliant
P1: library part CMP-1502-01064-3, Color=Black, Contact Resistance=20mΩ, Current Rating=3A, Max Operating Temperature=105°C, Min Operating Temperature=-40°C, Operating Supply Voltage=250V, Connector Type="Male Pin", Contact Material=Copper, Contact Mating Length=5.9944mm, Contact Plating=Gold, Gender=Male, Height=8.89mm, Lead Free="Lead Free", Lead Pitch=2.54mm, Mount="Through Hole", NexarPartId=32855522, Number Of Contacts=4, Number of Pins=4, Number of Positions=4, Number of Rows=1, Orientation=Vertical, Packaging=Bulk, Pitch=2.54mm, REACH SVHC=Unknown, RoHS=Compliant, Termination=Solder, Voltage Rating=250V
Q1: library part CMP-2100-03686-1, "TOSHIBA Field-Effect Transistor Silicon P-Channel MOS Type (U-MOS VI), 20 V, -55 to 125 degC, 3-Pin SOTFL, RoHS, Tape and Reel", Case/Package=SOT-23-3, Continuous Drain Current (ID)=6A, Drain To Source Breakdown Voltage=-20V, Drain To Source Resistance=47.4mOhm, Drain to Source Voltage (Vdss)=20V, Gate to Source Voltage (Vgs)=8V, Input Capacitance=840pF, Manufacturer=Toshiba, Max Operating Temperature=150degC, Max Power Dissipation=1W, Min Operating Temperature=-55degC, Package Description="3-Pin Small Outline Transistor, Flat Lead, Body 2.9 x 1.8 mm, Pitch 0.95 mm", Package Quantity=3000, Package Reference=SOT-23F, Power Dissipation=2W, Datasheet URL=https://toshiba.semicon-storage.com/info/docget.jsp?did=2429&prodName=SSM3J328R, Datasheet Version=41699.0, Element Configuration=Single, Manufacturer URL=http://www.toshiba.com/, Mount=SurfaceMount, Number Of Channels=1, Number of Elements=1, Number of Pins=3, Package URL=https://toshiba.semicon-storage.com/ap-en/design-support/package/detail.SOT-23F.html, Packaging=TapeandReel, Radiation Hardening=No, Rds On Max=29.8mOhm, RoHSCompliant=true, Turn-Off Delay Time=107ns, Turn-On Delay Time=32ns
Q2: library part CMP-1048-00631-1, "General Purpose Transistor, NPN Silicon, 3-Pin SOT-23, Pb-Free, Tape and Reel", Manufacturer="On Semiconductor", ComponentLink1Description="Manufacturer URL", ComponentLink1URL=http://www.onsemi.com/, ComponentLink2Description=Datasheet, ComponentLink2URL=http://www.onsemi.cn/pub_link/Collateral/MMBT3904LT1-D.PDF, ComponentLink3Description="Package Specification", ComponentLink3URL=http://www.onsemi.cn/pub_link/Collateral/318-08.PDF, DatasheetVersion="Rev. 12", fT Min (MHz)=300, IC Continuous (A)=0.2, Mounting Technology="Surface Mount", PackageDescription="3-Pin Small Outline Transistor, Body 2.92 x 1.3 mm, Pitch 0.95 mm", PackageReference=SOT-23-3-318-08, PackageVersion="Rev. AP, 11/2009", Packing="Tape and Reel", PartNumber=MMBT3904LT1G, Polarity=NPN, RoHS=TRUE
Q3 Q4 Q5: library part CMP-12801-000057-1, "MOSFET N-CH 20V 0.63A SOT23-3", Continuous Drain Current=630mA, Drain To Source Breakdown Voltage=20V, Drain To Source Resistance=0.4Ω, Gate To Source Voltage=8V, Input Capacitace At Vds="150pF @ 16V", Manufacturer="Diodes Inc.", Max Forward Diode Voltage=1V, Max Junction Temp=+150°C, Package=SOT23, Power Dissipation=350mW, Pulse Drain Current=1.5A, Temperature="-65°C to +150°C", Temperature Range Low=-65°C, Automotive=Yes, Automotive Grade="Grade 0", Category=Trans, ComponentLink2Description=Datasheet, ComponentLink2URL=https://www.diodes.com/assets/Datasheets/ds30938.pdf, Depletion Mode=False, Device Class L1="Discrete Semiconductors", Device Class L2=Transistors, Device Class L3=MOSFETs, Digikey Description="MOSFET N-CH 20V 0.63A SOT23-3", Drain To Source Voltage=20V, Footprint Url=https://www.diodes.com/assets/Package-Files/SOT23.pdf, Gate Charge At Vgs="0.9nC @ 4.5V", Height=1.1mm, Lead Free=Yes, Manufacturer Part Number=DMN2004K-7, Mouser Description="MOSFET 20V 540mA", Number Of Channels=1, Number Of N Channels=1, Octopart=https://octopart.com/dmn2004k-7-diodes+inc.-7127688, Reverse Recovery Charge=0.85nC, Reverse Recovery Time=5.5ns, RoHS=TRUE, Rthja Max=357°C/W, Standoff Height=0.013mm, Temperature Range High=+150°C, Threshold Vgs Max=1V, Threshold Vgs Min=0.5V, Turn Off Delay Time=59.4ns, Turn On Delay Time=5.7ns
R1 R18 R21 R26: library part CMP-26527-003681-1, "300Ω ±5% 0.125W 0805 Thick Film Chip Resistor AEC-Q200 compliant, RMCF0805JT300R", Case Code (Imperial)=0805, Case Code (Metric)=2012, Max Operating Temperature=155°C, Max Power Dissipation=125mW, Min Operating Temperature=-55°C, Package Quantity=5000, Resistance=300R, Resistor Type="Thick Film", Temperature Coefficient=200ppm/°C, Tolerance=5%, Case/Package=0805, Contact Plating=Tin, Features="Automotive AEC-Q200", Height=0.026inch, Length=0.079inch, Mount="Surface Mount", Number of Terminations=2, Packaging="Tape and Reel", Radiation Hardening=No, RoHS Compliant=Yes, Series=RMCF, Width=0.049inch
R2 R3 R4 R5 R6 R7 R8 R9 R10 R11: library part CMP-26527-003818-1, "100kΩ ±1% 0.125W 0805 Thick Film Chip Resistor AEC-Q200 compliant, RMCF0805FG100K", Case Code (Imperial)=0805, Case Code (Metric)=2012, Max Operating Temperature=155°C, Max Power Dissipation=125mW, Min Operating Temperature=-55°C, Package Quantity=10000, Resistance=100kR, Resistor Type="Thick Film", Temperature Coefficient=100ppm/°C, Tolerance=1%, Case/Package=0805, Construction=Rectangular, Contact Plating=Tin, Depth=1.25mm, Features="Automotive AEC-Q200", Height=0.026inch, Length=0.079inch, Military Standard=Not, Mount="Surface Mount", Number of Terminations=2, Packaging="Tape and Reel", Radiation Hardening=No, RoHS Compliant=Yes, Series=RMCF, Width=0.049inch
R12: library part CMP-26527-006913-1, "3kΩ ±5% 0.125W 0805 Thick Film Chip Resistor AEC-Q200 compliant", Case Code (Imperial)=0805, Case Code (Metric)=2012, Max Operating Temperature=155°C, Max Power Dissipation=125mW, Min Operating Temperature=-55°C, Resistance=3kR, Resistor Type="Thick Film", Temperature Coefficient=200ppm/°C, Tolerance=5%, Case/Package=0805, Construction=Rectangular, Contact Plating=Tin, Depth=1.25mm, Features="Automotive AEC-Q200", Height=0.026inch, Length=0.079inch, Military Standard=Not, Mount="Surface Mount", Number of Terminations=2, Packaging="Tape and Reel", Radiation Hardening=No, RoHS Compliant=Yes, Series=RMCF, Width=0.049inch
R13: library part CMP-26527-003681-1, "300Ω ±5% 0.125W 0805 Thick Film Chip Resistor AEC-Q200 compliant", Case Code (Imperial)=0805, Case Code (Metric)=2012, Max Operating Temperature=155°C, Max Power Dissipation=125mW, Min Operating Temperature=-55°C, Package Quantity=5000, Resistance=300R, Resistor Type="Thick Film", Temperature Coefficient=200ppm/°C, Tolerance=5%, Case/Package=0805, Contact Plating=Tin, Features="Automotive AEC-Q200", Height=0.026inch, Length=0.079inch, Mount="Surface Mount", Number of Terminations=2, Packaging="Tape and Reel", Radiation Hardening=No, RoHS Compliant=Yes, Series=RMCF, Width=0.049inch
R14: library part CMP-26527-003818-1, "100kΩ ±1% 0.125W 0805 Thick Film Chip Resistor AEC-Q200 compliant", Case Code (Imperial)=0805, Case Code (Metric)=2012, Max Operating Temperature=155°C, Max Power Dissipation=125mW, Min Operating Temperature=-55°C, Package Quantity=10000, Resistance=100kR, Resistor Type="Thick Film", Temperature Coefficient=100ppm/°C, Tolerance=1%, Case/Package=0805, Construction=Rectangular, Contact Plating=Tin, Depth=1.25mm, Features="Automotive AEC-Q200", Height=0.026inch, Length=0.079inch, Military Standard=Not, Mount="Surface Mount", Number of Terminations=2, Packaging="Tape and Reel", Radiation Hardening=No, RoHS Compliant=Yes, Series=RMCF, Width=0.049inch
R15: library part CMP-26527-000121-1, "RES 10K OHM 1% 1/8W 0805", Case Code (Imperial)=0805, Case Code (Metric)=2012, Max Operating Temperature=155°C, Max Power Dissipation=125mW, Min Operating Temperature=-55°C, Resistance=10kR, Resistor Type="Thick Film", Temperature Coefficient=100ppm/°C, Tolerance=1%, Case/Package=0805, Construction=Rectangular, Contact Plating=Tin, Depth=1.25mm, Features="Automotive AEC-Q200", Height=0.026inch, Lead Free="Lead Free", Length=2mm, Military Standard=Not, Mount="Surface Mount", Number of Terminations=2, Packaging="Tape and Reel", Power Rating=125mW, Radiation Hardening=No, RoHS Compliant=Yes, Series=RMCF, Size Code=0805, Width=0.049inch
R16: library part CMP-26527-002331-1, "1kΩ ±1% 0.125W 0805 Thick Film Chip Resistor AEC-Q200 compliant", Case Code (Imperial)=0805, Case Code (Metric)=2012, Max Operating Temperature=155°C, Max Power Dissipation=125mW, Min Operating Temperature=-55°C, Resistance=1kR, Resistor Type="Thick Film", Temperature Coefficient=100ppm/°C, Tolerance=1%, Case/Package=0805, Construction=Rectangular, Contact Plating=Tin, Depth=1.25mm, Features="Automotive AEC-Q200", Height=0.026inch, Lead Free="Lead Free", Length=2mm, Military Standard=Not, Mount="Surface Mount", Number of Terminations=2, Packaging="Tape and Reel", Power Rating=125mW, Radiation Hardening=No, RoHS Compliant=Yes, Series=RMCF, Size Code=0805, Width=0.049inch
R17: library part CMP-2001-00434-1, Manufacturer=Panasonic, Part Number=ERJ-6GEYJ563V
R19 R22 R27: library part CMP-26527-001731-1, "100Ω ±1% 0.125W 0805 Thick Film Chip Resistor AEC-Q200 compliant, RMCF0805FT100R", Case Code (Imperial)=0805, Case Code (Metric)=2012, Max Operating Temperature=155°C, Max Power Dissipation=125mW, Min Operating Temperature=-55°C, Power Rating=250mW, Resistance=100R, Resistor Type="Thick Film", Temperature Coefficient=100ppm/°C, Tolerance=1%, Case/Package=0805, Construction=Rectangular, Contact Plating=Tin, Depth=1.25mm, Features="Automotive AEC-Q200", Height=0.026inch, Lead Free="Lead Free", Length=2mm, Military Standard=Not, Mount="Surface Mount", Number of Terminations=2, Packaging="Tape and Reel", Radiation Hardening=No, RoHS Compliant=Yes, Series=RMCF, Size Code=0805, Width=0.049inch
R20 R23 R24 R25 R28 R29: library part CMP-26527-000121-1, "RES 10K OHM 1% 1/8W 0805, RMCF0805FT10K0", Case Code (Imperial)=0805, Case Code (Metric)=2012, Max Operating Temperature=155°C, Max Power Dissipation=125mW, Min Operating Temperature=-55°C, Resistance=10kR, Resistor Type="Thick Film", Temperature Coefficient=100ppm/°C, Tolerance=1%, Case/Package=0805, Construction=Rectangular, Contact Plating=Tin, Depth=1.25mm, Features="Automotive AEC-Q200", Height=0.026inch, Lead Free="Lead Free", Length=2mm, Military Standard=Not, Mount="Surface Mount", Number of Terminations=2, Packaging="Tape and Reel", Power Rating=125mW, Radiation Hardening=No, RoHS Compliant=Yes, Series=RMCF, Size Code=0805, Width=0.049inch
SW1: library part CMP-71745-000011-1, "SWITCH SLIDE DPDT 200MA 12V", Current Rating=200mA, Max Operating Temperature=85°C, Min Operating Temperature=-40°C, Operating Force=153gf, Voltage Rating (DC)=12V, Actuator Length=2mm, Actuator Material=Nylon, Actuator Type=Standard, Contact Material=Copper, Contact Plating=Silver, Contact Style=Non-Shorting, Electrical Life=10000Cycles, Mount="Surface Mount", Packaging="Cut Tape", Series=CL-SB, Switch Function=On-On, Switch Travel=2mm, Throw Configuration=DPDT
SW2 SW3 SW4: library part CMP-03402-000004-1, "SWITCH TACTILE SPST-NO 0.05A 24V", Contact Current Rating=50mA, Contact Resistance=100mΩ, Manufacturer="TE Connectivity", Operating Force=160gf, Temperature="-35°C to +85°C", Temperature Range High=+85°C, Temperature Range Low=-35°C, Voltage Rating Dc=24V, Automotive=No, Category=Switch, ComponentLink2Description=Datasheet, ComponentLink2URL=https://www.te.com/commerce/DocumentDelivery/DDEController?Action=showdoc&DocId=Customer+Drawing%7F1825910%7FC10%7Fpdf%7FEnglish%7FENG_CD_1825910_C10.pdf%7F2-1825910-7, Device Class L1=Electromechanical, Device Class L2=Switches, Device Class L3="Pushbutton Switches", Digikey Description="SWITCH TACTILE SPST-NO 0.05A 24V", Electromechanical Life=100000Cycles, Height=13.3mm, Lead Free=Yes, Manufacturer Part Number=2-1825910-7, Mount="Through Hole", Mouser Description="Switch Tactile OFF (ON) SPST Extended Round Button PC Pins 0.05A 24VDC 100000Cycles 1.57N Thru-Hole Loose", Octopart=https://octopart.com/2-1825910-7-te+connectivity-42270510, Package=2-1825910-7, RoHS=TRUE, Throw Configuration=SPST-NO
U1 U2: library part CMP-1310-00171-1, "Single Supply Quad Operational Amplifier, 3 to 32 V, 0 to 70 degC, 14-Pin SOIC, Pb-Free, Tape and Reel", Manufacturer="On Semiconductor", ComponentLink1Description="Manufacturer URL", ComponentLink1URL=http://www.onsemi.com/, ComponentLink2Description=Datasheet, ComponentLink2URL=http://www.onsemi.cn/pub_link/Collateral/LM324-D.PDF, ComponentLink3Description="Package Specification", ComponentLink3URL=http://www.onsemi.com/pub_link/Collateral/751A-03.PDF, DatasheetVersion="Rev. 25", Mounting Technology="Surface Mount", PackageDescription="14-Pin Small Outline Integrated Circuit, Body 8.65 x 3.9 mm, Pitch 1.27 mm", PackageReference=SOIC-14-751A-03, PackageVersion="Rev. K, 05/2011", Packing="Tape and Reel", PartNumber=LM324DR2G, RoHS=TRUE, VCC Max (V)=32, VCC Min (V)=3
U3: library part CMP-0244-00307-2, "IC REG LINEAR 3.3V 800MA SOT223", Case/Package=SOT-223, Dropout Voltage=1.1V, Input Bias Current=5mA, Max Input Voltage=15V, Max Operating Temperature=125°C, Max Output Current=1.3A, Max Output Voltage=3.3V, Max Power Dissipation=12W, Min Input Voltage=5.3V, Min Operating Temperature=-40°C, Output Current=950mA, Output Voltage Accuracy=1%, Package Quantity=1, Quiescent Current=10mA, Accuracy=1%, Contact Plating=Tin, Height=1.8mm, Lead Free="Lead Free", Length=6.5mm, Max Supply Voltage=15V, Min Output Voltage=3.3V, Min Supply Voltage=3.3V, Mount="Surface Mount", Nominal Output Voltage=3.3V, Number of Outputs=1, Number of Pins=4, Number of Regulators=1, Number of Terminals=4, Output Type=Fixed, Output Voltage=3.3V, Packaging="Tape and Reel", Polarity=Positive, Power Dissipation=12W, Radiation Hardening=No, REACH SVHC="No SVHC", Termination=SMD/SMT, Weight=0.01lb, Width=3.5mm

## Via types
v1: diameter 0.6, hole 0.3, Top Layer to Bottom Layer, 17 vias

## Nets (pads, with @x,y where several pads share a name; then routed paths per layer and width w, separated by ;. In a path a pad name is that pad's centre, name@x,y a point inside that pad or via, vN(x,y) a via of type N, cw(c..) or ccw(c..) an arc to the next point about the centre after c; other vN are vias at no path point)
+3V3: C8.1 D1.2 D4.2 D7.2 D8.2 D9.2 J1.1 J7.1 J10.1 P1.1 R2.1 R6.1 SW2.1 SW3.1 SW4.1 U1.11 U2.11 U3.2 U3.4 | length 47.9
  Bottom Layer w0.508: D7.2@3.275,5.07 6.171,5.07 6.507,5.406 8.962,5.406 9.606,6.05 SW4.1@11.025,6.05 ; R2.1 10,63.276 ; U1.11 10,63.276 ; R6.1 10,63.276 ; D9.2@21.58,5.275 24.476,5.275 24.812,5.611 27.328,5.611 27.972,6.255 SW3.1@29.33,6.255 ; U3.2 34.866,28.129 33.86,29.135 33.86,31.197 34.098,31.435 36.853,31.435 D4.2@37.849,30.439 ; J7.1 D4.2@37.849,30.439 ; D8.2@39.868,5.07 42.764,5.07 43.1,5.406 45.538,5.406 46.182,6.05 SW2.1@47.618,6.05 ; C8.1 41.074,30.567 38.713,30.567 D4.2 D4.2@37.849,30.439
GND: B-1.1 C2.2 C4.2 C6.2 C7.2 C8.2 C9.2 D5.2 J1.3 J4.2 J4.3 J6.2 J6.3 J8.1 J11.1 P1.2 Q2.2 Q3.2 Q4.2 Q5.2 R1.2 R5.2 R7.2 R12.1 R13.2 R17.1 R20.2 R23.2 R24.2 R25.2 R28.2 R29.2 U1.4 U2.4 U3.1 | length 83.7
  Bottom Layer w0.508: v1(0.652,7.811) cw(c0.658,7.303) v1(0.652,7.811) 2.489,7.829 cw(c2.494,7.321) 2.491,7.829 cw(c2.645,7.345) 2.492,7.829 2.73,7.904 R20.2@2.926,8.21 ; J6.2 4.5,33.746 5.189,34.435 5.385,34.435 7.5,36.55 J6.3 7.215,38.535 J6.3@6.085,38.535 ; v1@4.525,63.25 v1(4.5,63.25) 4.513,63.263 R5.2@6.177,63.263 ; R5.2@5.967,63.052 R5.2@6.177,63.263 ; R5.2 R5.2@6.177,63.263 ; Q3.2@7.075,4.55 Q3.2 8.446,3.129 9.363,3.129 v1(9.381,3.111) ; R29.2@12.975,3.8 R29.2@13.003,3.828 ; R7.2 13.848,63.255 15.745,63.255 v1(15.75,63.25) ; Q2.2 19.889,37.189 20.656,36.422 21.737,37.503 26.718,37.503 28.006,36.215 D5.2 28.777,35.744 29.407,35.744 29.99,35.161 34.368,35.161 ; v1(19.153,8.17) 21.028,8.17 R28.2@21.117,8.259 ; R17.1 20.656,33.967 21.166,33.457 C9.2 ; Q5.2@25.38,4.755 25.38,4.705 26.579,3.506 v1(27.688,3.506) ; R25.2@31.308,3.978 31.335,4.005 R25.2@31.308,4.033 ; C7.2 34.368,33.653 34.368,35.161 ; C7.2@34.518,33.502 33.147,32.131 33.147,28.074 34.297,26.924 35.814,26.924 37.082,28.192 ; U3.1 35.293,30.152 36.278,30.152 36.576,29.855 36.576,28.698 37.082,28.192 ; v1(37.348,7.969) 37.366,7.987 39.376,7.987 R23.2@39.552,8.163 ; J8.1 37.323,37.719 36.29,36.686 R12.1 34.368,36.67 34.368,35.161 ; R13.2 41.183,27.199 41.183,28.192 ; C8.2 41.183,29.175 41.183,28.192 ; Q4.2@43.668,4.55 Q4.2 44.881,3.287 v1(45.976,3.287) ; R24.2@49.568,3.8 R24.2@49.596,3.772 ; J4.3 J4.2 ; 37.082,28.192 41.183,28.192
NetB+1_1: B+1.1 Q1.3 R14.1 SW1.2 | length 26.6
  Bottom Layer w0.254: SW1.2@2.65,22.5 SW1.2 ; Q1.3 R14.1
  Bottom Layer w0.508: 1.524,18.034 1.524,21.374 SW1.2@2.65,22.5 ; SW1.2 4.191,23.841 4.191,25.654 5.681,27.144 Q1.3
NetC1_1: C1.1 R3.2 R4.1 | length 14.5
  Bottom Layer w0.203: C1.1 6.19,46.856 7.931,45.115 14.307,45.115 14.791,45.6 14.791,46.09 R4.1@15.276,46.575 ; R4.1 R4.1@15.276,46.575 ; R3.2 R4.1@15.276,46.575
NetC1_2: C1.2 J2.1 J11.13 U1.6 U1.7 | length 7.8
  Bottom Layer w0.203: J2.1 C1.2 U1.7 U1.6
NetC2_1: C2.1 R4.2 U1.5 | length 9.7
  Bottom Layer w0.203: U1.5 8.73,49.095 C2.1 8.825,48.775 11.071,46.529 13.348,46.529 13.724,46.154 R4.2
NetC3_1: C3.1 R8.2 R9.1 | length 8.6
  Bottom Layer w0.203: C3.1 41.474,48.804 46.412,48.804 46.531,48.685 46.531,48.6 46.906,48.224 R8.2 47.06,46.325 R9.1
NetC3_2: C3.2 J3.1 J11.14 U2.6 U2.7 | length 9.8
  Top Layer w0.203: J3.1@34.89,47.392 35.39,47.892 J3.1
  Bottom Layer w0.203: J3.1@36,48.5 39.32,48.5 C3.2 39.44,48.62 U2.7 U2.6
NetC4_1: C4.1 R9.2 U2.5 | length 12.3
  Bottom Layer w0.203: U2.5 41.98,52.04 40.259,50.319 40.259,47.905 40.604,47.56 43.603,47.56 44.117,48.075 C4.1 44.573,47.845 44.573,47.414 45.833,46.154 R9.2
NetC5_1: C5.1 R10.2 R11.1 | length 13.3
  Bottom Layer w0.203: R10.2 37.959,63.736 R11.1 37.945,63.904 38.676,64.635 45.625,64.635 46.835,63.425 C5.1
NetC5_2: C5.2 J4.1 J11.16 U2.13 U2.14 | length 12.1
  Top Layer w0.203: 50,52.28 v1(50,55)
  Bottom Layer w0.203: U2.13 U2.14 ; C5.2 U2.14 ; v1(50,55) 47.828,57.172 47.248,57.172 47.06,57.36 U2.14
NetC6_1: C6.1 R11.2 U2.12 | length 9.9
  Bottom Layer w0.203: R11.2 39.497,63.596 39.873,63.221 40.026,63.221 41.672,61.575 C6.1 U2.12
NetC7_1: C7.1 D3.2 D5.1 F1.2 U3.3 | length 19
  Bottom Layer w0.254: D5.1 26.054,35.617 26.7,35.617 28.606,33.711 F1.2 28.705,33.412 D3.2 31.043,33.637 C7.1 32.004,32.757 32.004,27.432 33.607,25.829 U3.3
NetC9_1: C9.1 J11.15 R15.2 R17.2 | length 7.8
  Bottom Layer w0.254: R15.2 19.313,33.679 19.636,33.356 19.636,33.242 20.575,32.303 21.912,32.303 22.666,33.057 C9.1 22.666,36.262 R17.2
NetD1_1: D1.1 R1.1
NetD2_1: D2.1 D6.1 F1.1 | length 6.1
  Bottom Layer w0.254: D2.1 D6.1 24.765,33.12 F1.1
NetD2_2: D2.2 J5.1 SW1.1 | length 24.9
  Bottom Layer w0.254: SW1.1 2.936,20.086 2.936,20.832 3.725,21.621 3.766,21.621 4.25,22.105 4.25,22.895 4.945,23.59 8.223,23.59 9.398,24.765 J5.1 21.648,25.077 21.648,27.787 21.921,28.06 D2.2
NetD3_1: D3.1 R12.2 | length 2.1
  Bottom Layer w0.508: D3.1 30.931,36.799 32.687,36.799 R12.2
NetD4_1: D4.1 R13.1 | length 3.4
  Bottom Layer w0.203: D4.1 39.886,26.571 41.044,25.413 R13.1
NetD6_2: D6.2 J9.1 SW1.4 | length 25.1
  Bottom Layer w0.254: SW1.4 8.002,22.352 22.225,22.352 24.074,24.201 24.115,24.201 24.679,24.765 J9.1 25.088,24.95 25.088,27.787 24.815,28.06 D6.2
NetD7_1: D7.1 R18.1 | length 3.2
  Bottom Layer w0.203: D7.1@3.275,2.53 5.523,2.53 6.149,1.904 R18.1@6.149,1.8
NetD8_1: D8.1 R21.1 | length 3.2
  Bottom Layer w0.203: D8.1@39.868,2.53 42.116,2.53 42.742,1.904 R21.1@42.742,1.8
NetD9_1: D9.1 R26.1 | length 3.2
  Bottom Layer w0.203: D9.1@21.58,2.735 23.828,2.735 24.454,2.109 R26.1@24.454,2.005
NetJ1_2: J1.2 U2.10 | length 15.3
  Top Layer w0.203: J1.2 30.466,57.034 v1(32.5,55)
  Bottom Layer w0.203: v1(32.5,55) 39.62,55 41.98,57.36 U2.10
NetJ1_4: J1.4 U2.3 | length 21
  Top Layer w0.203: J1.4 27.52,57.014 v1(27.52,53.975)
  Bottom Layer w0.203: v1@27.432,53.975 43.185,53.975 44.52,52.64 U2.3
NetJ1_5: J1.5 J10.2 | length 8.1
  Top Layer w0.203: v1(22.75,63) 24.816,60.934 J1.5
  Bottom Layer w0.203: 20.088,65.662 v1(22.75,63)
NetJ1_6: J1.6 U1.3 | length 17.1
  Top Layer w0.203: v1(22.75,55) 24.784,57.034 J1.6
  Bottom Layer w0.203: U1.3 11.27,52.64 13.63,55 v1(22.75,55)
NetJ6_1: J6.1 SW1.5
NetJ10_3: J10.3 P1.3 | length 35.8
  Top Layer w0.203: J10.3 6.95,60.233 v1(18.415,48.768)
  Bottom Layer w0.203: v1(18.415,48.768) 26.502,48.768 P1.3
NetJ10_6: J10.6 P1.4 | length 33.6
  Top Layer w0.203: J10.6 14.57,55.28 19.304,50.546 27.264,50.546 P1.4
NetJ10_13: J10.13 R16.1
NetJ11_6: J11.6 R19.1 R20.1 | length 5.8
  Bottom Layer w0.203: v1(4.953,11.303) 4.953,8.483 R20.1@5.026,8.41 ; R20.1@5.026,8.21 R20.1@5.026,8.41 ; R19.1@7.533,8.89 5.506,8.89 R20.1@5.026,8.41
NetJ11_8: J11.8 R27.1 R28.1 | length 6.2
  Bottom Layer w0.203: R28.1@23.424,8.669 23.772,9.017 25.948,9.017 R27.1@25.372,9.593 ; v1(23.473,11.168) 23.473,8.565 R28.1@23.529,8.509
NetJ11_9: J11.9 R29.1 SW4.4 | length 3.3
  Bottom Layer w0.203: R29.1@15.075,3.6 16.869,1.806 17.269,1.806 SW4.4@17.525,1.55
NetJ11_10: J11.10 R25.1 SW3.4 | length 3.2
  Bottom Layer w0.203: R25.1@33.435,3.805 35.485,1.755 SW3.4@35.83,1.755
NetJ11_11: J11.11 R22.1 R23.1 | length 5.4
  Bottom Layer w0.203: v1(41.783,10.922) 41.783,8.431 R23.1@41.851,8.363 ; R23.1@41.851,8.163 R23.1@41.851,8.363 ; R22.1@44.236,8.89 42.378,8.89 R23.1@41.851,8.363
NetJ11_12: J11.12 R24.1 SW2.4 | length 3.3
  Bottom Layer w0.203: R24.1@51.668,3.6 52.016,3.252 52.416,3.252 SW2.4@54.118,1.55
NetQ1_1: Q1.1 Q2.3 R14.2 | length 6.6
  Bottom Layer w0.254: Q1.1 15.941,32.365 16.737,33.161 R14.2 16.891,34.801 17.229,35.139 Q2.3
NetQ1_2: Q1.2 R15.1 | length 3
  Bottom Layer w0.254: Q1.2 17.841,30.507 18.913,31.579 R15.1
NetQ2_1: Q2.1 R16.2 | length 6.5
  Bottom Layer w0.254: R16.2 14.505,31.609 15.431,32.535 15.431,36.29 16.279,37.139 Q2.1
NetQ3_1: Q3.1 R19.2 | length 8.7
  Bottom Layer w0.203: Q3.1@8.975,4.55 11.916,4.55 12.049,4.683 12.049,6.925 10.348,8.626 9.749,8.626 R19.2@9.485,8.89
NetQ3_3: Q3.3 R18.2
NetQ4_1: Q4.1 R22.2 | length 8.6
  Bottom Layer w0.203: Q4.1@45.568,4.55 48.365,4.55 48.642,4.827 48.642,6.925 47.051,8.516 46.562,8.516 R22.2@46.188,8.89
NetQ4_3: Q4.3 R21.2
NetQ5_1: Q5.1 R27.2 | length 9.1
  Bottom Layer w0.203: Q5.1@27.28,4.755 27.28,4.805 27.578,5.103 28.187,5.103 28.306,4.984 28.306,4.875 28.455,4.726 30.205,4.726 30.354,4.875 30.354,7.13 29.096,8.388 28.476,8.388 27.9,8.963 R27.2@27.9,9.017 ; R27.2@27.9,9.213 R27.2@27.9,9.267
NetQ5_3: Q5.3 R26.2
NetR2_2: R2.2 R5.1 U1.10 | length 6.6
  Bottom Layer w0.203: R5.1 R2.2 U1.10
NetR3_1: R3.1 U1.1 U1.2 | length 4.6
  Bottom Layer w0.203: U1.2 U1.1 13.81,49.086 R3.1
NetR6_2: R6.2 R7.1 U1.12 | length 6.6
  Bottom Layer w0.203: U1.12 R6.2 11.286,61.708 R7.1
NetR8_1: R8.1 U2.1 U2.2 | length 3.8
  Bottom Layer w0.203: U2.2 U2.1 R8.1
NetR10_1: R10.1 U2.8 U2.9 | length 4.1
  Bottom Layer w0.203: R10.1 39.44,60.429 U2.8 U2.9
NetU1_8: U1.8 U1.9 | length 1.3
  Bottom Layer w0.203: U1.8 U1.9
NetU1_13: U1.13 U1.14 | length 1.3
  Bottom Layer w0.203: U1.13 U1.14
pads on no net: J10.4 J10.5 J10.7 J10.8 J10.9 J10.10 J10.11 J10.12 J10.14 J10.15 J10.16 J10.17 J10.18 J10.19 J10.20 J11.2 J11.3 J11.4 J11.5 J11.7 J11.17 J11.18 J11.19 J11.20 SW1.3 SW1.6 SW2.2 SW2.3 SW3.2 SW3.3 SW4.2 SW4.3